# EAGLE board Sound (EAGLE 9.6.2)
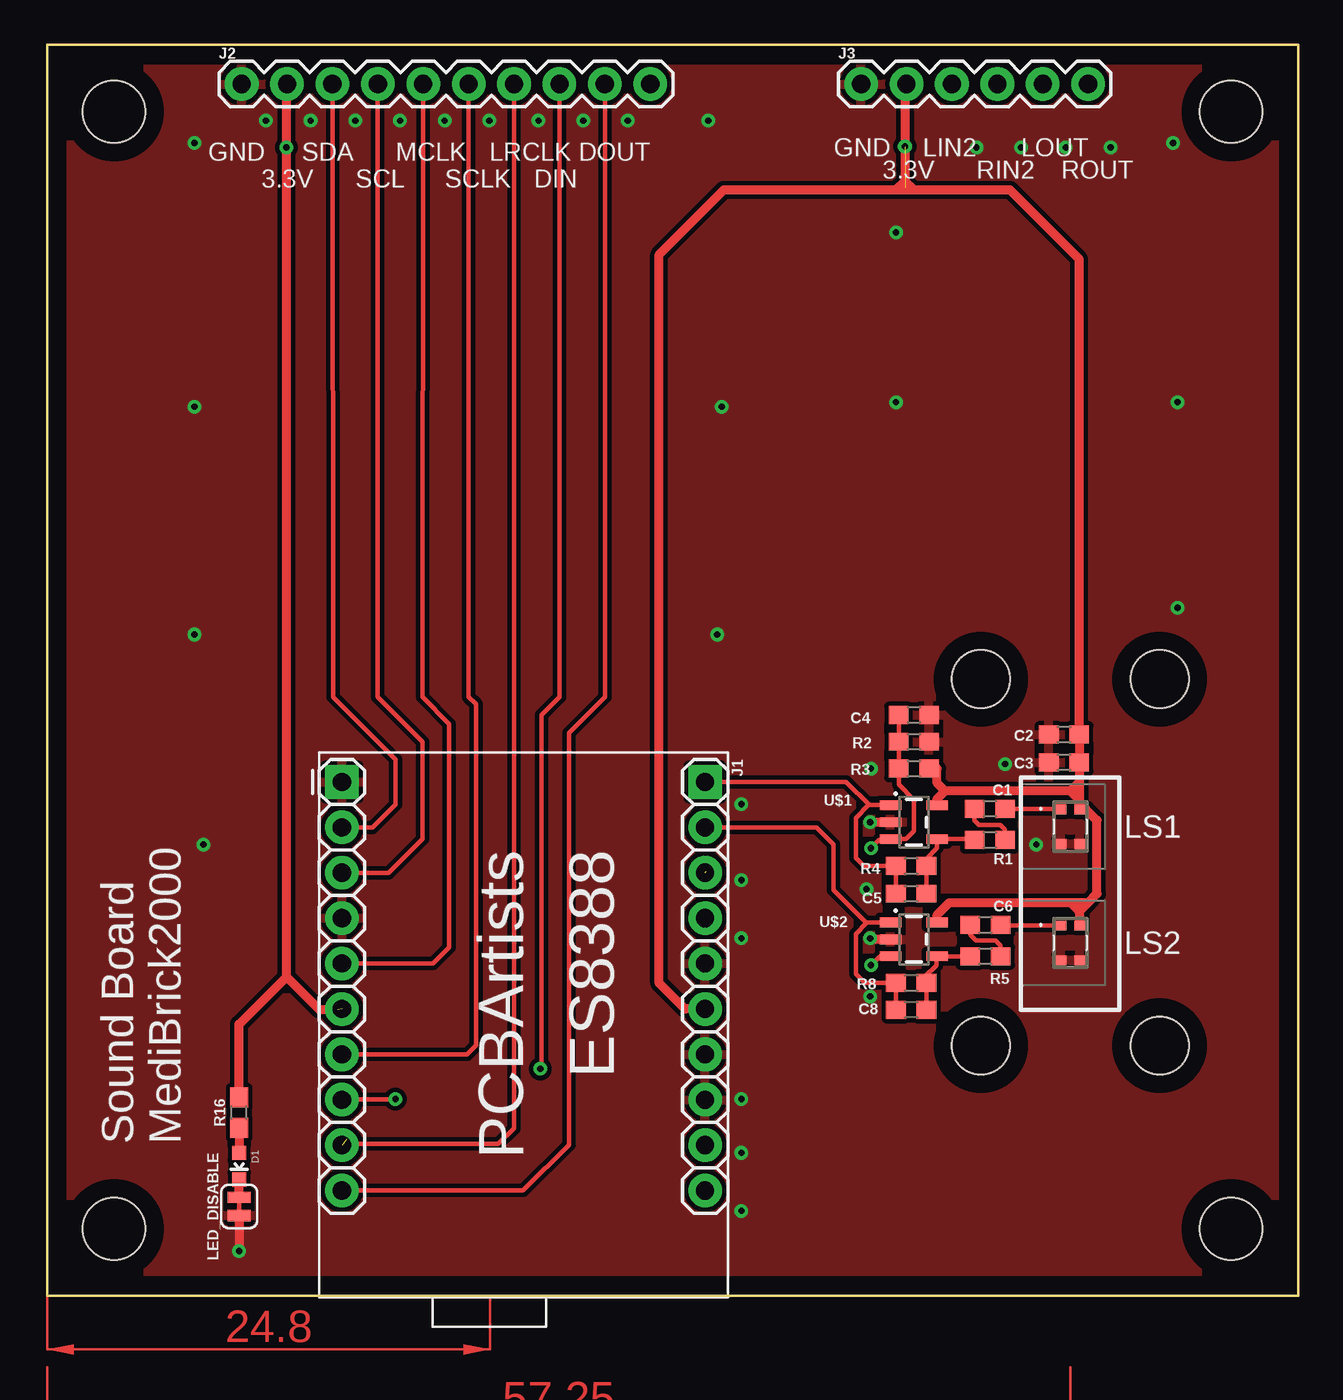
[diagram p0: board, top side]
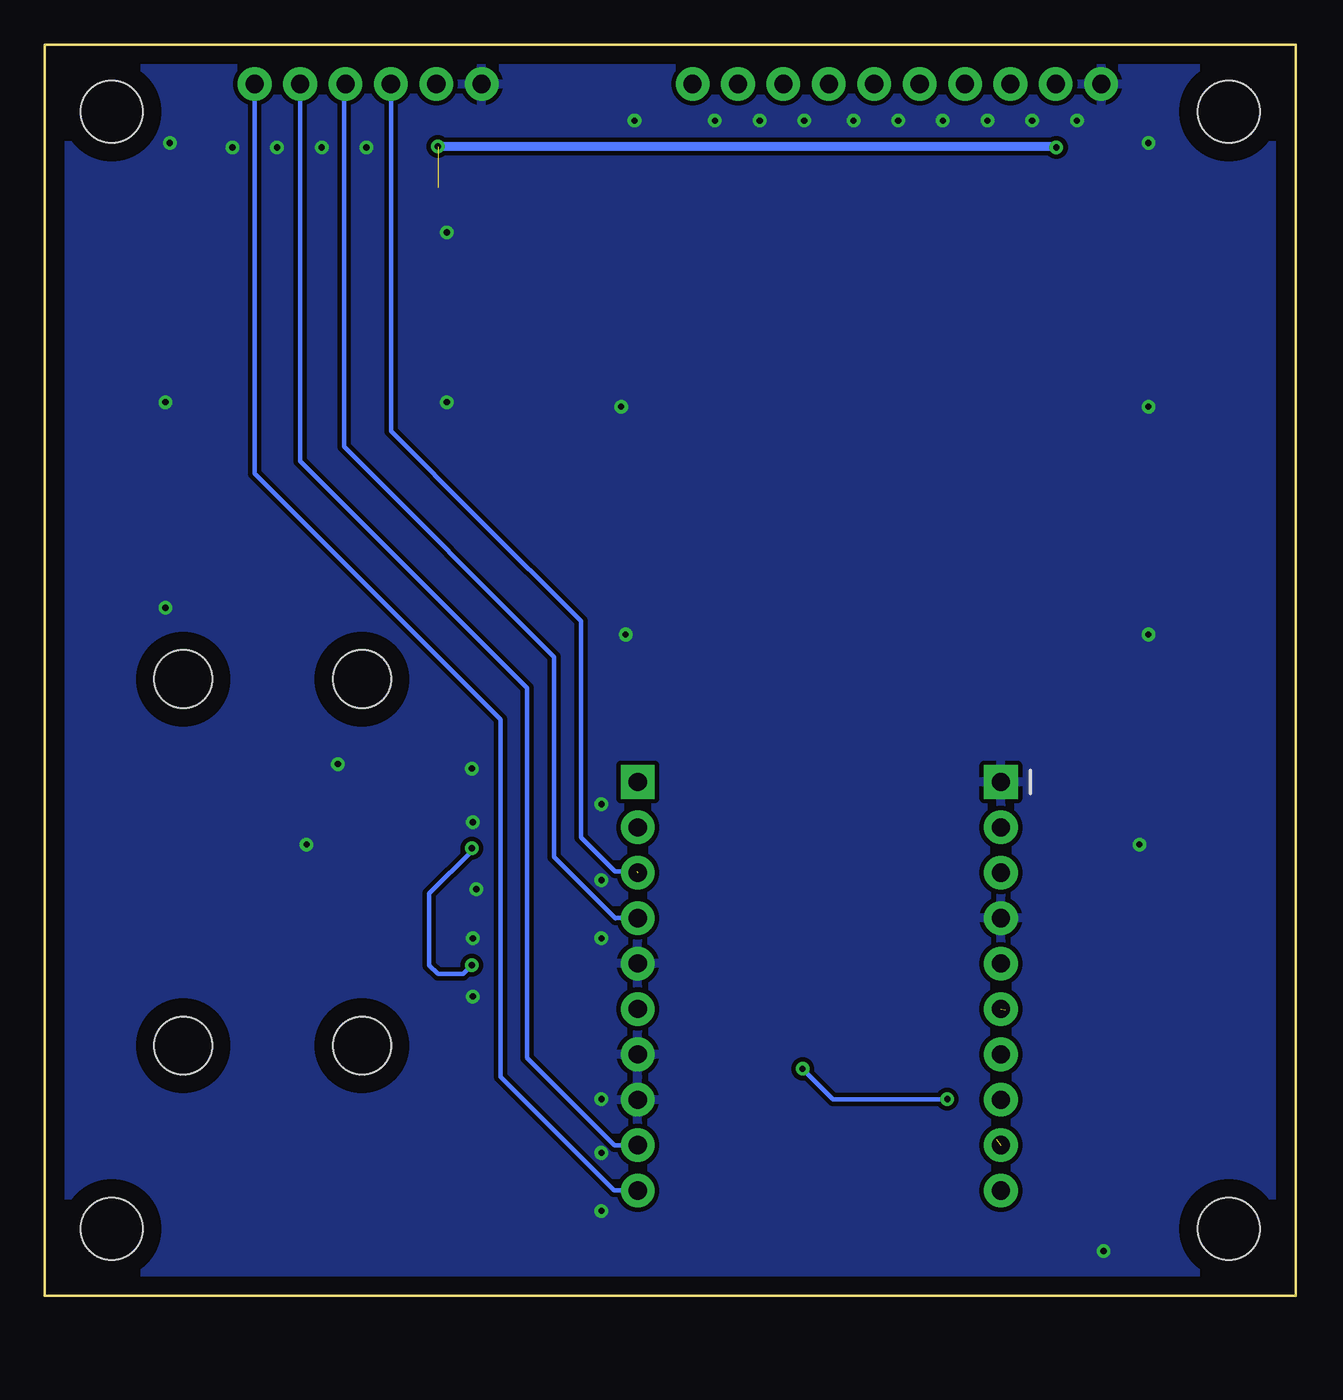
[diagram p1: board, bottom side, seen from below]

Size 70 x 70 mm. Coordinates in mm from the lower left corner, seen from the top.
Outline: 0,0 0,70 70,70 70,0 0,0
Copper layers (1*16): Top 0.035mm / dielectric 1.5mm / Bottom 0.035mm
Design rules "default": minimum track width 6mil, minimum drill 0.35mm, track to track 6mil, track to pad 6mil, pad to pad 6mil, via to via 6mil, smd to smd 6mil, copper to edge 40mil, drill to drill 6mil, minimum pad ring 10mil, minimum via ring 8mil, stop-mask expansion 4mil, vias tented up to drill 0mil, thermal gap 10mil
Holes 3.5 mm at 3.75,66.25 66.25,66.25 66.25,3.75 3.75,3.75
Holes 3.25 mm at 52.25,14 62.25,14 62.25,34.5 52.25,34.5

## Footprints (pad centres in the part's own frame; a part is rotated, then mirrored left to right if it is on the bottom)
0603 = smd 1.1 x 1: 1 -0.85,0; 2 0.85,0
LED-0603 = smd 0.8 x 0.8: A 0,-0.75; C 0,0.75
ES8388 = drill 1.016 pad 1.88 square: 1 0,0; 2 0,20.32 | drill 1.016 pad 1.88: 3 2.54,0; 4 2.54,20.32; 5 5.08,0; 6 5.08,20.32; 7 7.62,0; 8 7.62,20.32; 9 10.16,0; 10 10.16,20.32; 11 12.7,0; 12 12.7,20.32; 13 15.24,0; 14 15.24,20.32; 15 17.78,0; 16 17.78,20.32; 17 20.32,0; 18 20.32,20.32; 19 22.86,0; 20 22.86,20.32
1X10 = drill 1.016 pad 1.88: 1 0,0; 2 2.54,0; 3 5.08,0; 4 7.62,0; 5 10.16,0; 6 12.7,0; 7 15.24,0; 8 17.78,0; 9 20.32,0; 10 22.86,0
1X06 = drill 1.016 pad 1.88: 1 0,0; 2 2.54,0; 3 5.08,0; 4 7.62,0; 5 10.16,0; 6 12.7,0
SMT-JUMPER_2_NC_TRACE_SILK = smd 0.635 x 1.27: 1 -0.508,0; 2 0.508,0
AMM2742TR = smd 0.6 x 0.54: 1 -0.525,0.965; 2 -0.525,-0.965; 3 0.525,-0.965; 4 0.525,0.965
SOT23-5 = smd 0.55 x 1.2: 1 -0.95,-1.3; 2 0,-1.3; 3 0.95,-1.3; 4 0.95,1.3; 5 -0.95,1.3

## Placement (x,y rotation side)
C1  4.7uF  [0603]  52.75,27.25 180 top
C2  10uF  [0603]  56.9,31.4 180 top
C3  0.1uF  [0603]  56.9,29.85 180 top
C4  1.0uF  [0603]  48.5,32.5 0 top
C5  27pF  [0603]  48.35,22.5 180 top
C6  4.7uF  [0603]  52.5,20.75 180 top
C8  27pF  [0603]  48.35,16 180 top
D1  RED  [LED-0603]  10.75,7.25 180 top
FRAME1  FRAME-LETTERNO_PACKAGE  [DUMMY]  -0.25,-5.25 0 top  (outside the outline)
J1  [ES8388]  16.5,28.75 270 top
J2  [1X10]  10.89,67.8 0 top
J3  [1X06]  45.55,67.8 0 top
LED_DISABLE  JUMPER-SMT_2_NC_TRACE_SILK  [SMT-JUMPER_2_NC_TRACE_SILK]  10.75,5 90 top
LS1  AMM-2742-T-R  [AMM2742TR]  57.25,26.25 0 top
LS2  AMM-2742-T-R  [AMM2742TR]  57.25,19.75 0 top
R1  4.7k  [0603]  52.75,25.5 180 top
R2  10k  [0603]  48.5,29.5 0 top
R3  10k  [0603]  48.5,31 180 top
R4  300k  [0603]  48.35,24.05 180 top
R5  4.7k  [0603]  52.5,19 180 top
R8  300k  [0603]  48.35,17.5 180 top
R16  1k  [0603]  10.75,10.25 90 top
U$1  OPA344  [SOT23-5]  48.5,26.5 270 top
U$2  OPA344  [SOT23-5]  48.5,19.95 270 top

## Library data of the parts
C1 C6 = SparkFun-Capacitors; PROD_ID: CAP-08280
C2 = SparkFun-Capacitors; PROD_ID: CAP-11015
C3 = SparkFun-Capacitors; PROD_ID: CAP-00810
C4 = SparkFun-Capacitors; PROD_ID: CAP-00868
C5 C8 = SparkFun-Capacitors; PROD_ID: CAP-09989
D1 = SparkFun-LED; PROD_ID: DIO-00819
FRAME1 = SparkFun-Aesthetics; DESIGNER: Nobody; VERSION: v01
J1 = ES8388 
J2 = SparkFun-Connectors; PROD_ID: CONN-11563
J3 = SparkFun-Connectors; PROD_ID: CONN-08437
LED_DISABLE = SparkFun-Jumpers
LS1 LS2 = AMM-2742-T-R; DESCRIPTION: Microphones MICROPHONE OMNI -42 DB 2VDC 150uA; HEIGHT: 0.9mm; MANUFACTURER_NAME: PUI Audio; MANUFACTURER_PART_NUMBER: AMM-2742-T-R; MOUSER_PART_NUMBER: 665-AMM-2742-T-R; MOUSER_PRICE-STOCK: https://www.mouser.co.uk/ProductDetail/PUI-Audio/AMM-2742-T-R?qs=zhx2xqPtQQyJoGop0O%252BpMA%3D%3D
R1 R5 = SparkFun-Resistors; PROD_ID: RES-07857
R2 R3 = SparkFun-Resistors; PROD_ID: RES-00824
R4 R8 = SparkFun-Resistors; PROD_ID: RES-10809
R16 = SparkFun-Resistors; PROD_ID: RES-07856
U$1 U$2 = SparkFun-IC-Amplifiers; PROD_ID: IC-08251

## Nets
3.3V: C2.1 C3.1 J1.11 J1.12 J2.2 J3.2 LS1.4 LS2.4 R2.2 R16.2 U$1.5 U$2.5
GND: C2.2 C3.2 C4.2 J1.1 J1.7 J1.10 J1.14 J1.16 J2.1 J3.1 LED_DISABLE.1 LS1.2 LS1.3 LS2.2 LS2.3 R3.1 U$1.2 U$2.2
N$1: J1.6 J3.3
N$2: J1.8 J3.4
N$3: J1.3 J2.3
N$4: J1.5 J2.4
N$5: J1.9 J2.5
N$6: J1.13 J2.6
N$7: J1.15 J2.8
N$8: J1.19 J2.9
N$9: J1.17 J2.7
N$10: J1.18 J3.5
N$11: J1.20 J3.6
N$12: C1.1 LS1.1
N$13: C5.2 J1.2 R4.2 U$1.1
N$14: C1.2 R1.1
N$15: C5.1 R1.2 R4.1 U$1.4
N$16: C4.1 R2.1 R3.2 U$1.3 U$2.3
N$17: C8.2 J1.4 R8.2 U$2.1
N$18: C6.1 LS2.1
N$19: C6.2 R5.1
N$20: C8.1 R5.2 R8.1 U$2.4
N$26: D1.A R16.1
N$28: D1.C LED_DISABLE.2

## Tracks (layer width: path | path; a pad name or v marks a point on that pad's centre or on a via)
3.3V  (via drill 0.35)  (2 unrouted)
  Top 0.152: 57.75,27.24 LS1.4
  Top 0.508: 16.25,16 15.25,16 13.4,17.85 | 57.75,27.75 57.75,28.75 57.25,28.25 | 57.75,27.75 57.75,27.24 | 57.25,28.25 50.25,28.25 | 57.25,28.25 57.75,28.25 C3.1 C2.1 57.75,58 53.88,61.88 48.5,61.88 | R2.2 49.8,29.5 49.8,28.7 50.25,28.25 | 57.75,27.75 57.25,28.25 | 48,62 48,62.38 | J3.2 48,67.71 48,62.5 48,62.38 | J2.2 13.5,67.87 13.5,68 13.4,67.9 v13.4,64.25 13.4,17.85 | R16.2 10.75,15.2 13.4,17.85 | U$1.5 49.8,27.8 50.25,28.25 | J1.12 35.7,16.05 34.25,17.5 34.25,58.25 37.88,61.88 47.5,61.88 | 47.5,61.88 48.5,61.88 | U$2.5 49.8,21.3 50.5,22 57.25,22 | 57.25,22 58.25,22 | LS2.4 57.77,21.52 | 58.25,22 57.77,21.52 | 58.25,22 58.75,22.5 58.75,26.6 58.13,27.21 LS1.4 | 57.77,21.52 57.73,21.52 57.25,22 | 47.5,61.88 48,62.38 | 48,62.38 48.5,61.88
  Bottom 0.254: v13.4,64.25 13.45,64.3
  Bottom 0.508: 13.45,64.3 v48,64.3
GND  (via drill 0.35)
  Top 0.508: LED_DISABLE.1 v10.75,2.5 | v46.05,26.5 U$1.2 | U$2.2 46.1,19.95 v46.05,20
  other vias: 8.25,64.5 8.25,49.75 8.25,37 8.75,25.25 63.25,38.5 63.25,50 63,64.5 12.25,65.75 14.75,65.75 17.25,65.75 19.75,65.75 22.25,65.75 24.75,65.75 27.5,65.75 30,65.75 32.5,65.75 38.85,23.25 38.85,20 38.85,11 38.85,8 38.85,4.75 52,64.25 54.5,64.25 57,64.25 59.5,64.25 38.85,27.5 45.85,22.75 46.1,29.5 53.6,29.75 55.35,25.25 46.05,16.75 37.75,49.75 37.5,37 37,65.75 47.5,50 47.5,59.5
  pour Bottom (isolate 0.254): 0,70 0,0 70,0 70,70
  pour Top (isolate 0.254): 0,70 0,0 70,0 70,70
N$1  (1 unrouted)
  Bottom 0.254: J3.3 50.63,48.38 45.75,43.5 40,37.75 40,25.65 38.1,23.75 36.85,23.75
N$2
  Bottom 0.254: J1.8 38.07,21.13 38.08,21.12 41.5,24.55 41.5,35.75 53.25,47.5 53.25,67.72 J3.4
N$3
  Top 0.254: J2.3 16,33.5 19.5,30 19.5,27.5 18.21,26.21 J1.3
N$4
  Top 0.254: J1.5 19.08,23.67 19.1,23.65 21,25.55 21,31 18.51,33.49 J2.4
N$5
  Top 0.254: J2.5 21,33.5 22.5,32 22.5,19.5 21.59,18.59 J1.9
N$6
  Top 0.254: J1.13 23.51,13.51 24,14 24,33.1 23.6,33.5 23.6,67.29 23.59,67.3 J2.6
N$7  (via drill 0.35)
  Top 0.254: J1.15 16.53,11 v19.5,11 | J2.8 28.67,33.5 27.67,32.5 27.67,12.7 v27.6,12.7
  Bottom 0.254: v19.5,11 25.9,11 v27.6,12.7
N$8
  Top 0.254: J1.19 26.64,5.89 29.21,8.46 29.21,31.5 31.21,33.5 J2.9
N$9  (1 unrouted)
  Top 0.254: J2.7 26.13,9.38 25.25,8.5 17,8.5 16.75,8.75
N$10
  Bottom 0.254: J3.5 55.71,46.71 43,34 43,13.3 38.13,8.43 J1.18
N$11
  Bottom 0.254: J1.20 36.86,5.89 36.85,5.9 38.15,5.9 44.5,12.25 44.5,32.25 58.25,46 J3.6
N$12
  Top 0.152: LS1.1 56.69,27.25
  Top 0.254: 56.69,27.25 C1.1
N$13
  Top 0.152: U$1.1 46,27.45
  Top 0.254: 46,27.45 44.7,28.75 J1.2 | C5.2 R4.2 45.7,24.05 45.25,24.5 45.25,26.75 45.95,27.45 U$1.1
N$14
  Top 0.254: R1.1 53.6,26.1 53.35,26.35 52.15,26.35 51.9,26.6 C1.2
N$15
  Top 0.152: 51.85,25.55 R1.2
  Top 0.254: 51.85,25.55 U$1.4 49.8,25.05 49.2,24.45 R4.1 C5.1
N$16  (via drill 0.35)
  Top 0.254: C4.1 R3.2 R2.1 47.65,28.6 48.5,27.75 48.5,26 48.05,25.55 U$1.3 47.15,25.5 46.55,25.5 v46.1,25.05 | U$2.3 46.6,19 v46.1,18.5
  Bottom 0.254: v46.1,25.05 46.1,24.9 48.5,22.5 48.5,18.5 48,18 46.6,18 v46.1,18.5
N$17
  Top 0.254: C8.2 R8.2 45.75,17.5 45.25,18 45.25,20.25 45.85,20.85 | U$2.1 45.9,20.9 45.85,20.85 | J1.4 43.04,26.21 44,25.25 44,22.7 45.85,20.85
N$18
  Top 0.254: LS2.1 53.38,20.71 C6.1
N$19
  Top 0.254: C6.2 51.65,20.2 51.97,19.88 53.07,19.88 53.35,19.6 R5.1
N$20
  Top 0.254: R5.2 U$2.4 49.75,18.95 49.75,18.5 49.1,17.85 R8.1 C8.1
N$26
  Top 0.508: R16.1 D1.A
N$28
  Top 0.508: LED_DISABLE.2 D1.C
(copper drawn outside any net)
  shapes: Top area x2

## Text on the board
tNames: GND | SDA | MCLK | LRCLK | DOUT | GND | LIN2 | LOUT | 3.3V | SCL | SCLK | DIN | 3.3V | RIN2 | ROUT | Sound Board / MediBrick2000